# Altium PCB Atmega128.PcbDoc
Units mm, origin at the board's own origin, x right, y up, seen from the top; angles counter-clockwise.
Board outline 45.6 x 43.2 mm, 2 copper layers (Top Layer, Bottom Layer), stack 1.571 mm thick; 29 components, 73 nets, 202 pads, 487 vias.
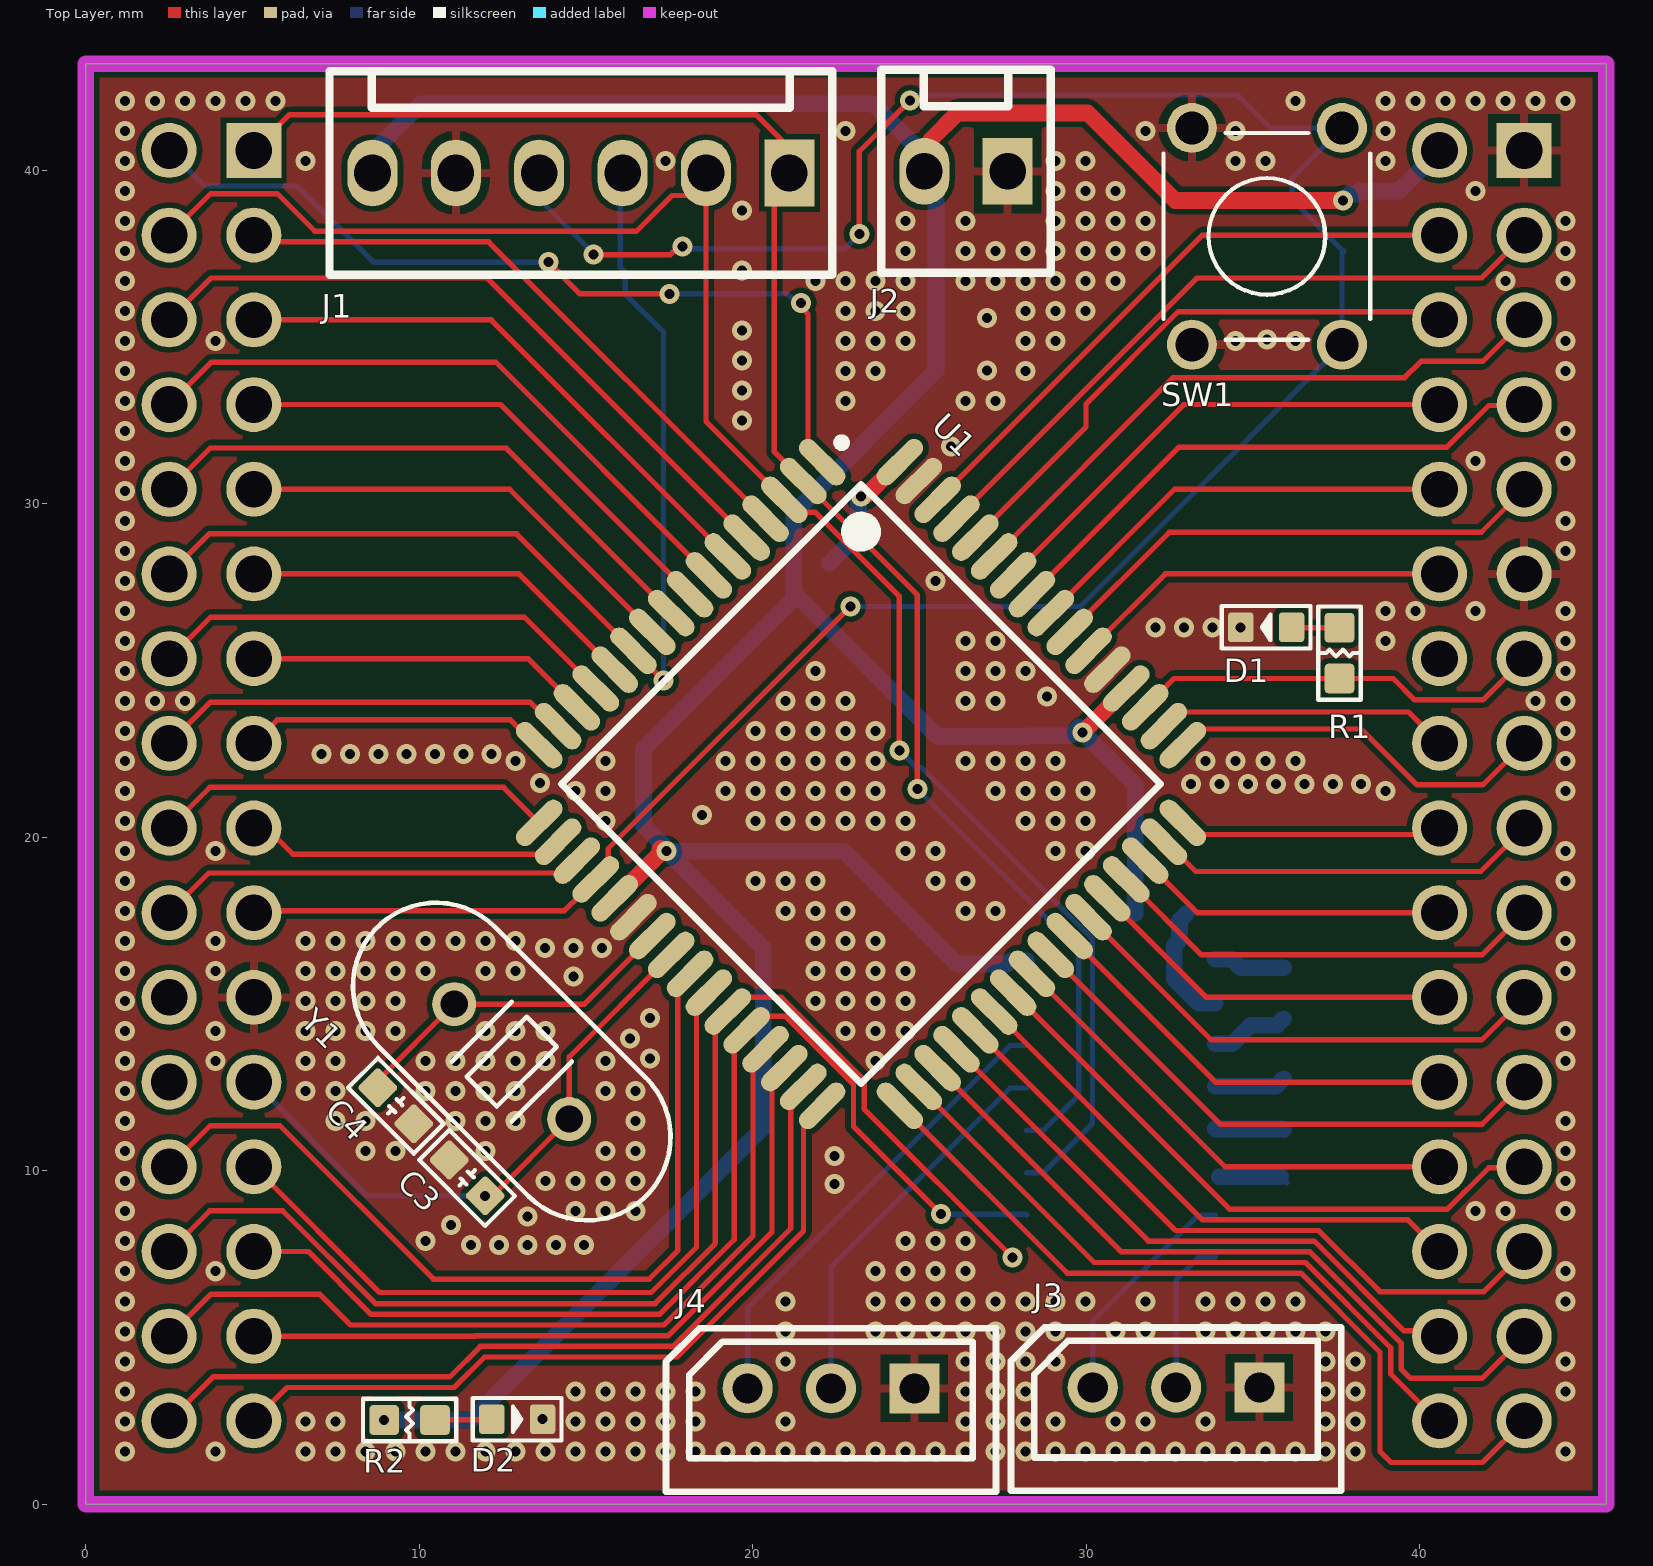
[diagram p0: Top Layer view]
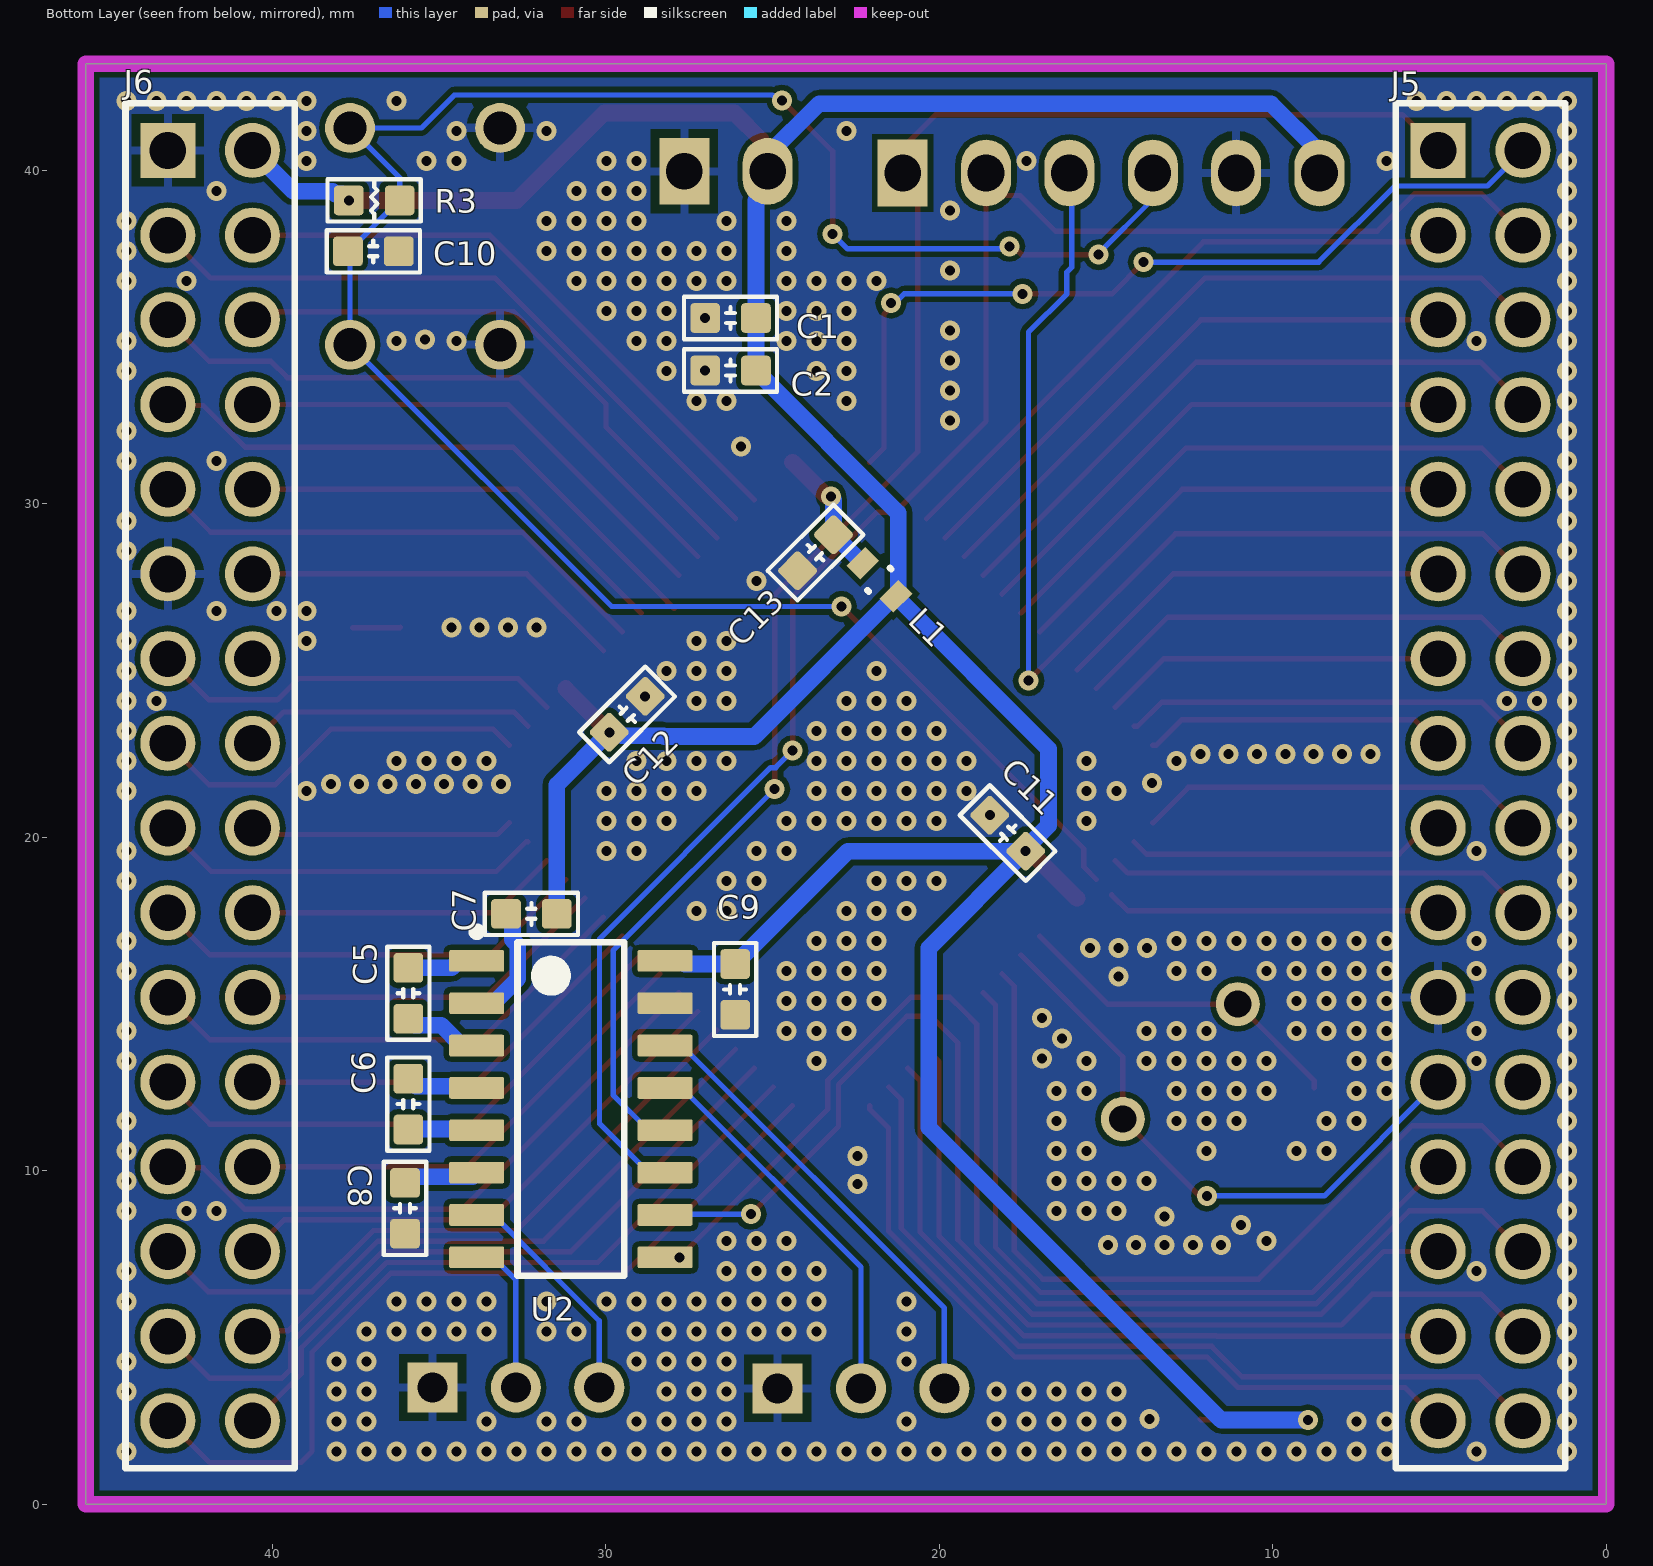
[diagram p1: Bottom Layer view, seen from below]
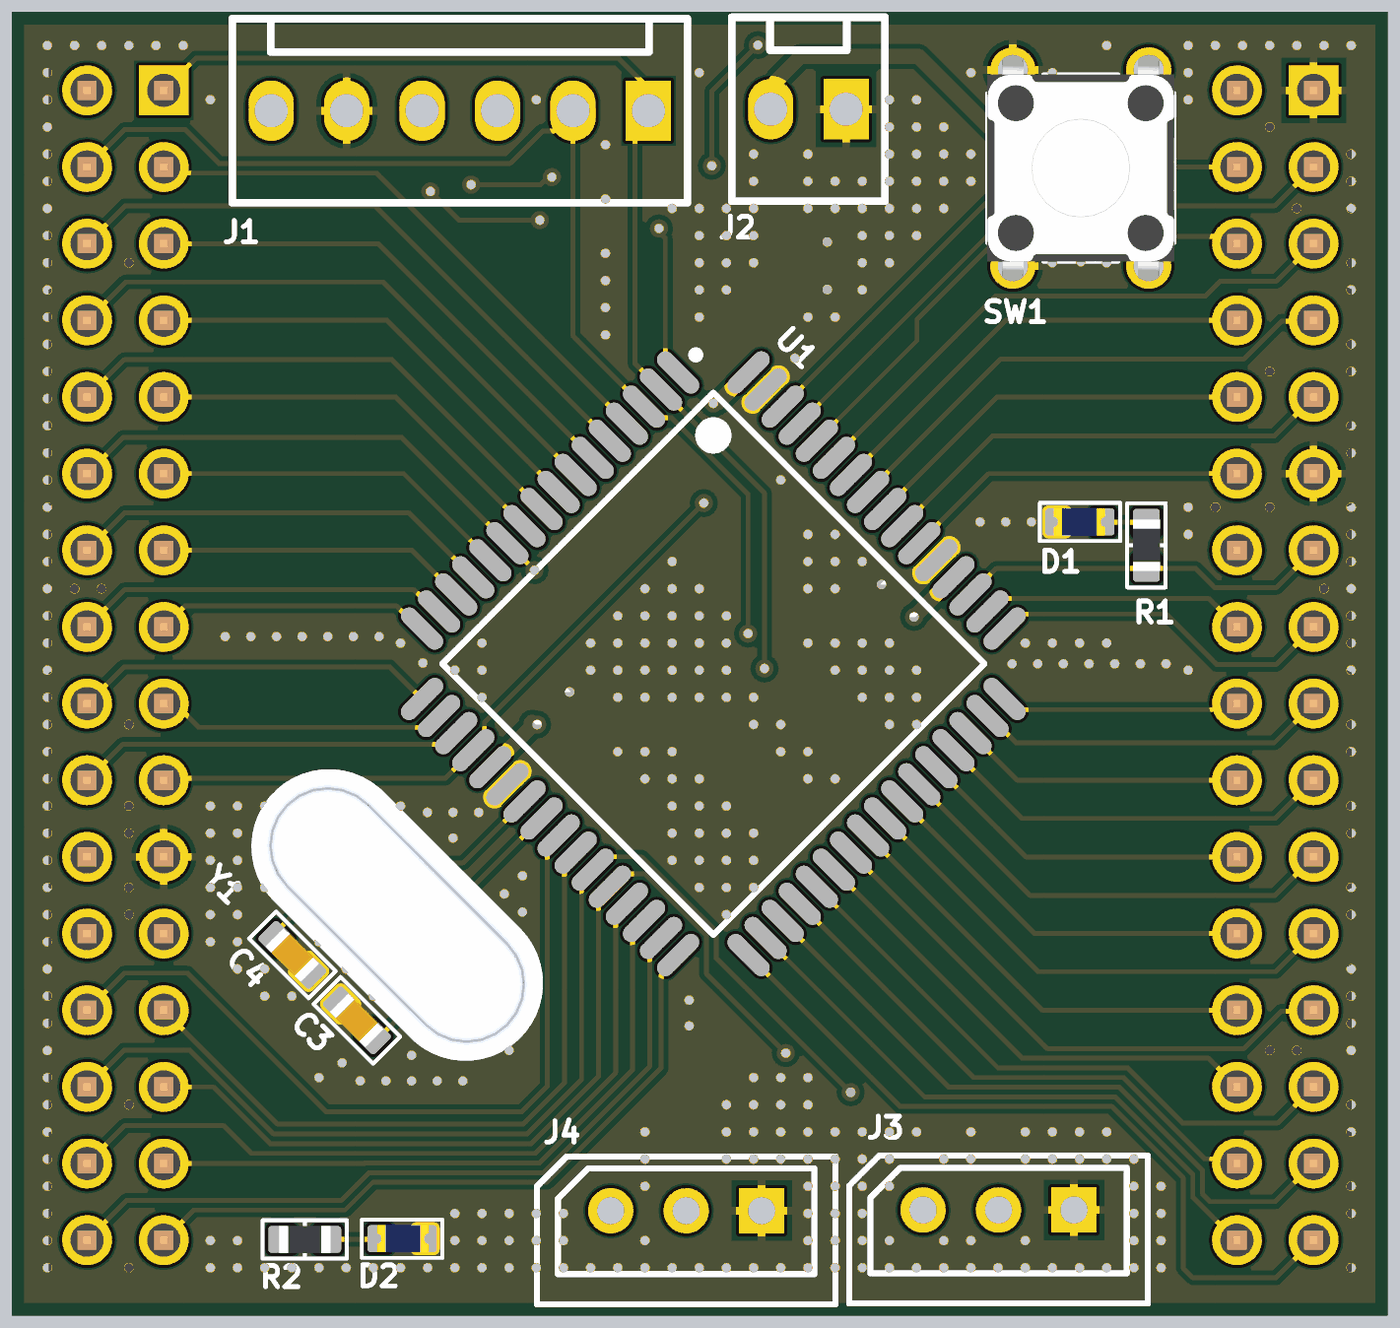
[diagram p2: 3D render of the assembled board from above, using the file's embedded part models]
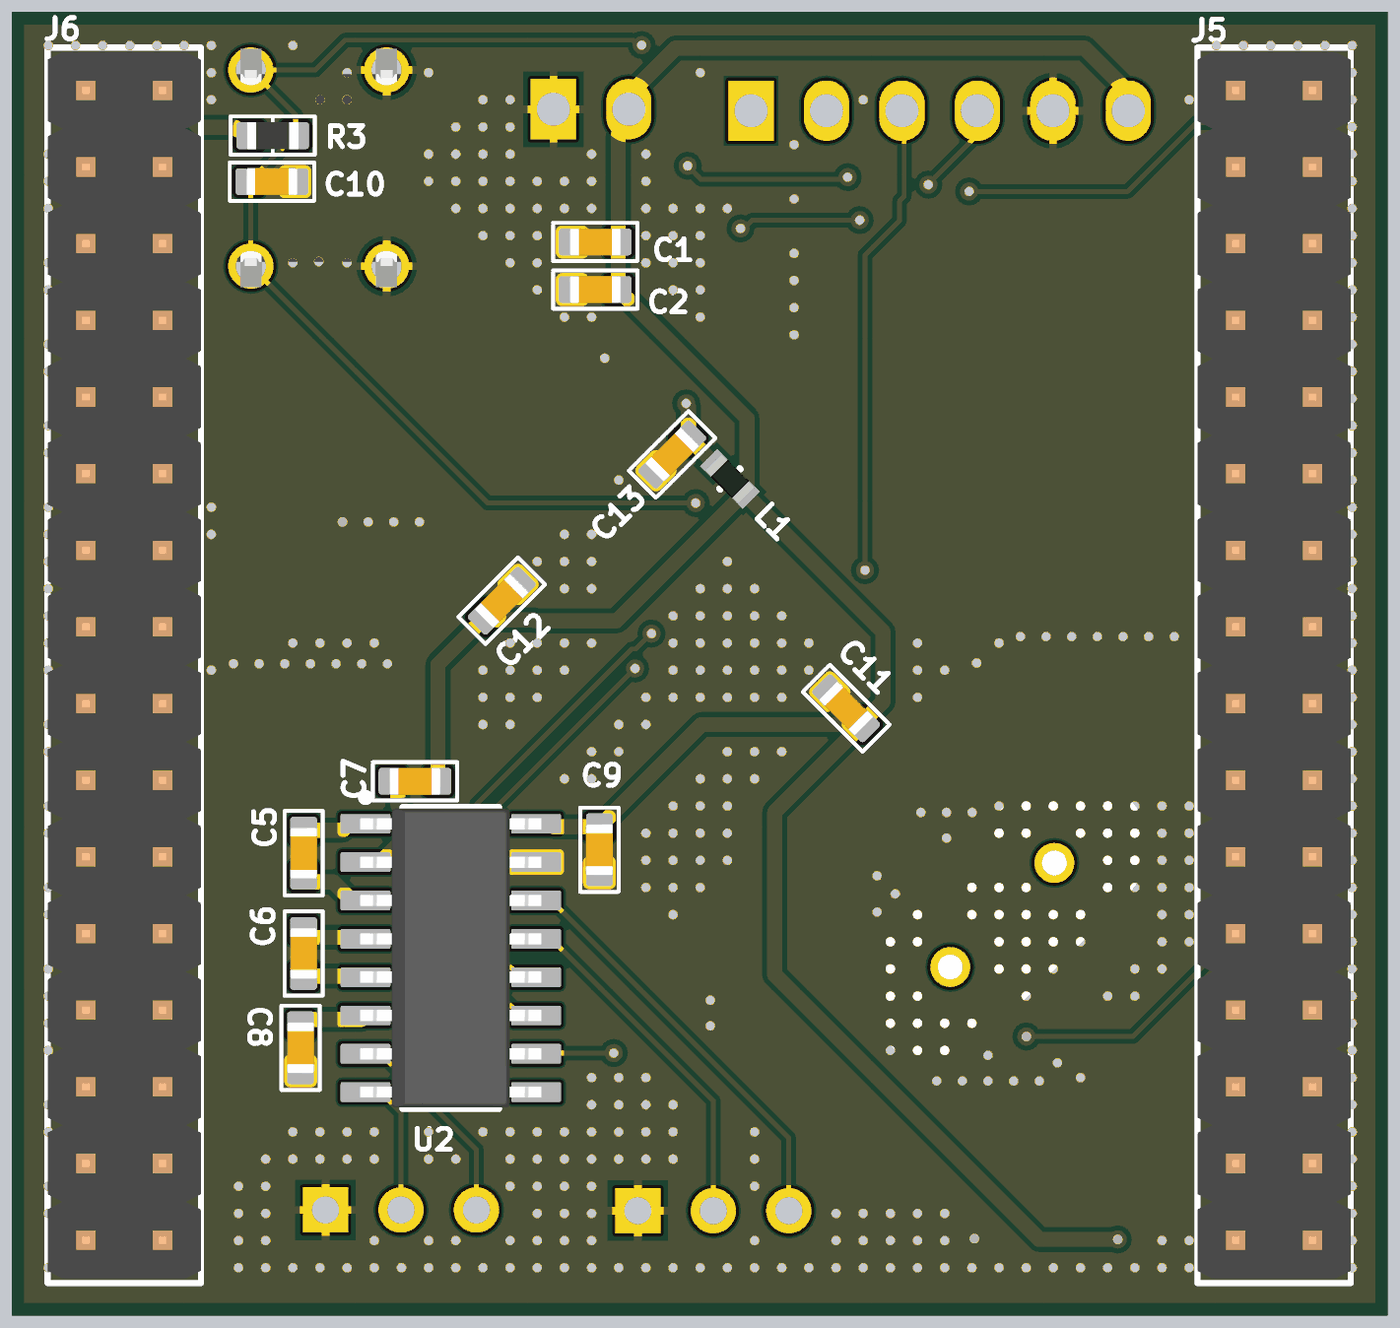
[diagram p3: 3D render of the assembled board from below, using the file's embedded part models]

## Layer stack, top to bottom
Top Solder: solder mask 0.0102, Solder Resist, Dk 3.5
Top Layer: signal copper 0.0356
Dielectric 1: dielectric 1.5, FR-4, Dk 4.8
Bottom Layer: signal copper 0.0356
Bottom Solder: solder mask 0.0102, Solder Resist, Dk 3.5

## Board outline
0,0 45.6,0 45.6,43.2 0,43.2

## Design rules (kind name [scope] priority, off if disabled: settings)
Clearance [All] p1: gap=0.16 ignorepadtopadclearanceinfootprint=FALSE except(0: Arc-Hole Track-Hole SMDPad-Hole THPad-Hole Via-Hole Fill-Hole Poly-Hole Region-Hole Text-Hole)
PolygonConnect [All] p1: thpad.connectstyle=Relief thpad.reliefconductorwidth=0.254 thpad.reliefentries=4 thpad.polygonreliefangle="90 Angle" thpad.airgapwidth=0.254 smdpad.connectstyle=Direct smdpad.reliefconductorwidth=0.254 smdpad.reliefentries=4 smdpad.polygonreliefangle="90 Angle" smdpad.airgapwidth=0.254 via.connectstyle=Direct via.reliefconductorwidth=0.254 via.reliefentries=4 via.polygonreliefangle="90 Angle" via.airgapwidth=0.254
RoomDefinition Sheet1 [InComponentClass('Sheet1')] p1: confinementstyle=ConfineIn formatcopy=TRUE lockcomponents=FALSE outline -10.6,-7.15 78.275,-7.15 78.275,52.025 -10.6,52.025
RoutingVias [All] p1: holewidth=0.3 width=0.6 viastyle="Through Hole" minholewidth=0.3 minwidth=0.6 maxholewidth=0.3 maxwidth=0.6
SolderMaskExpansion SolderMaskExpansion_1 [IsVia] p1: expansion=0.102 istentingtop=TRUE
SolderMaskExpansion [All] p2: expansion=0.102 istentingtop=FALSE
Width [All] p1: maxlimit=1 minlimit=0.16 preferedwidth=0.16 minimp=50.000000 maximp=50.000000 favimp=50.000000
30 further rules are at their usual default settings.

## Components (designator, comment, footprint, x,y, rotation, side; value= is the part's Value field where it differs from the comment)
C1 "Ceramic/1608" "Generic 1608-Footprint-1" 26.263,35.575 r0 bottom value=10uF
C2 "Ceramic/1608" "Generic 1608-Footprint-1" 26.263,34 r0 bottom value=100nF
C3 "Ceramic/1608" "Generic 1608-Footprint-1" 11.439,9.786 r315 top value=20nF
C4 "Ceramic/1608" "Generic 1608-Footprint-1" 9.3,11.95 r135 top value=20nF
C5 "Ceramic/1608" "Generic 1608-Footprint-1" 35.925,15.325 r90 bottom value=1uF
C6 "Ceramic/1608" "Generic 1608-Footprint-1" 35.925,12 r90 bottom value=1uF
C7 "Ceramic/1608" "Generic 1608-Footprint-1" 32.236,17.706 r0 bottom value=1uF
C8 "Ceramic/1608" "Generic 1608-Footprint-1" 36.025,8.875 r90 bottom value=1uF
C9 "Ceramic/1608" "Generic 1608-Footprint-1" 26.125,15.438 r90 bottom value=100nF
C10 "Ceramic/1608" "Generic 1608-Footprint-1" 36.975,37.575 r180 bottom value=100nF
C11 "Ceramic/1608" "Generic 1608-Footprint-1" 17.95,20.125 r45 bottom value=100nF
C12 "Ceramic/1608" "Generic 1608-Footprint-1" 29.361,23.689 r135 bottom value=100nF
C13 "Ceramic/1608" "Generic 1608-Footprint-1" 23.714,28.536 r315 bottom value=100nF
D1 "Generic 1608 LED BLUE" "Generic 1608 LED BLUE-Footprint-1" 35.375,26.3 r180 top
D2 "Generic 1608 LED BLUE" "Generic 1608 LED BLUE-Footprint-1" 12.963,2.55 r0 top
J1 "LW0640-06" LW0640-06 14.85,39.925 r180 top
J2 "LW0640-02" LW0640-02 26.4,39.975 r180 top
J3 "Molex 5267-03" "Molex 5267-03-Footprint" 32.7,3.5 r0 top
J4 "Molex 5267-03" "Molex 5267-03-Footprint" 22.35,3.475 r0 top
J5 "61303221121" 61303221121 3.77,21.55 r270 bottom locked
J6 "61303221121" 61303221121 41.87,21.55 r270 bottom locked
L1 "MLZ1608M100WT000" FP-MLZ1608-MFG 21.8,27.725 r225 bottom value=10uH
R1 "Generic 1608" "Generic 1608-Footprint-1" 37.6,25.525 r270 top value=330
R2 "Generic 1608" "Generic 1608-Footprint-1" 9.712,2.525 r180 top value=330
R3 "Generic 1608" "Generic 1608-Footprint-1" 36.95,39.1 r0 bottom value=4.7k
SW1 "DJT1102A" DJT1102A-Footprint-1 35.425,38.025 r270 top
U1 "ATmega128A-AU" 64A_N 23.25,21.6 r315 top locked
U2 "MAX232D" D0016A_M 31.05,11.85 r180 bottom
Y1 "ATS-49" ATS-49-Footprint-1 12.775,13.275 r45 top value=16MHz

## Footprints (in the part's own frame and the unit in brackets; to place one, negate y for a bottom-side part, rotate by r counter-clockwise, add the part's x,y. Pads: shape width x height; smd on the part's side, far side on the other; paste and mask are expansions set on the pad)
64A_N [mm] "Thin QFP, 64-Leads, Body 14x14mm, Pitch 0.8mm, IPC Medium Density"
  oval 1.75x0.55 smd: 1(-7.65,6) 2(-7.65,5.2) 3(-7.65,4.4) 4(-7.65,3.6) 5(-7.65,2.8) 6(-7.65,2) 7(-7.65,1.2) 8(-7.65,0.4) 9(-7.65,-0.4) 10(-7.65,-1.2) 11(-7.65,-2) 12(-7.65,-2.8) 13(-7.65,-3.6) 14(-7.65,-4.4) 15(-7.65,-5.2) 16(-7.65,-6) 33(7.65,-6) 34(7.65,-5.2) 35(7.65,-4.4) 36(7.65,-3.6) 37(7.65,-2.8) 38(7.65,-2) 39(7.65,-1.2) 40(7.65,-0.4) 41(7.65,0.4) 42(7.65,1.2) 43(7.65,2) 44(7.65,2.8) 45(7.65,3.6) 46(7.65,4.4) 47(7.65,5.2) 48(7.65,6)
  oval 0.55x1.75 smd: 17(-6,-7.65) 18(-5.2,-7.65) 19(-4.4,-7.65) 20(-3.6,-7.65) 21(-2.8,-7.65) 22(-2,-7.65) 23(-1.2,-7.65) 24(-0.4,-7.65) 25(0.4,-7.65) 26(1.2,-7.65) 27(2,-7.65) 28(2.8,-7.65) 29(3.6,-7.65) 30(4.4,-7.65) 31(5.2,-7.65) 32(6,-7.65) 49(6,7.65) 50(5.2,7.65) 51(4.4,7.65) 52(3.6,7.65) 53(2.8,7.65) 54(2,7.65) 55(1.2,7.65) 56(0.4,7.65) 57(-0.4,7.65) 58(-1.2,7.65) 59(-2,7.65) 60(-2.8,7.65) 61(-3.6,7.65) 62(-4.4,7.65) 63(-5.2,7.65) 64(-6,7.65)
  silkscreen extent -7.77,-6.35 6.35,6.95, body extent -7,-7 7,7, height 1.6
61303221121 [mm] "Pin Header, pitch 2.54 mm, THT, Vertical, dual row, 32p"
  rect 1.65x1.65 hole 1.1: 1(-19.05,-1.27)
  round 1.65 hole 1.1: 2(-19.05,1.27) 3(-16.51,-1.27) 4(-16.51,1.27) 5(-13.97,-1.27) 6(-13.97,1.27) 7(-11.43,-1.27) 8(-11.43,1.27) 9(-8.89,-1.27) 10(-8.89,1.27) 11(-6.35,-1.27) 12(-6.35,1.27) 13(-3.81,-1.27) 14(-3.81,1.27) 15(-1.27,-1.27) 16(-1.27,1.27) 17(1.27,-1.27) 18(1.27,1.27) 19(3.81,-1.27) 20(3.81,1.27) 21(6.35,-1.27) 22(6.35,1.27) 23(8.89,-1.27) 24(8.89,1.27) 25(11.43,-1.27) 26(11.43,1.27) 27(13.97,-1.27) 28(13.97,1.27) 29(16.51,-1.27) 30(16.51,1.27) 31(19.05,-1.27) 32(19.05,1.27)
  silkscreen extent -20.47,-2.54 20.47,2.54, body extent -20.32,-2.54 20.32,2.54, height 8.59
ATS-49-Footprint-1 [mil]
  round 52 hole 32: 1(0,96) 2(0,-96)
  silkscreen extent -98,-224 98,224, body extent -98,-226 98,226, height 138
D0016A_M [mm] "SOIC, 16-Leads, Body 10x4mm, Pitch 1.27mm, IPC Low Density"
  rrect15% 1.65x0.65 smd: 1(-2.825,4.445) 2(-2.825,3.175) 3(-2.825,1.905) 4(-2.825,0.635) 5(-2.825,-0.635) 6(-2.825,-1.905) 7(-2.825,-3.175) 8(-2.825,-4.445) 9(2.825,-4.445) 10(2.825,-3.175) 11(2.825,-1.905) 12(2.825,-0.635) 13(2.825,0.635) 14(2.825,1.905) 15(2.825,3.175) 16(2.825,4.445)
  silkscreen extent -2.95,-5 1.6,5.44, body extent -3,-4.95 3,4.95, height 1.59
DJT1102A-Footprint-1 [mm]
  round 1.5 hole 1: 1(-3.25,2.25) 2(-3.25,-2.25) 3(3.25,2.25) 4(3.25,-2.25)
  silkscreen extent -3.1,-3.1 3.1,3.1, body extent -3.95,-3.1 3.95,3.1, height 4.3
FP-MLZ1608-MFG [mm]
  rect 0.6x0.8 smd paste+0 mask+0: 1(-0.7,0) 2(0.7,0)
  silkscreen extent -0.02,-0.48 0.03,0.48, body extent -0.8,-0.4 0.8,0.4, height 0.95
"Generic 1608 LED BLUE-Footprint-1" [mil]
  rrect25% 30x35 smd: 1(-30.98,0) 2(29.02,0)
  silkscreen extent -53,-25 52,25, body extent -33,-18 33,18, height 35
"Generic 1608-Footprint-1" [mil]
  rrect25% 35x35 smd: 1(-30,0) 2(30,0)
  silkscreen extent -55,-25 55,25, body extent -33,-18 33,18, height 35
LW0640-02 [mm]
  rect 1.5x2 hole 1.1: 1(-1.25,0)
  oval 1.5x2 hole 1.1: 2(1.25,0)
  silkscreen extent -2.54,-3.05 2.54,3.05, body extent -2.5,-2.95 2.5,3.05, height 11.81
LW0640-06 [mm]
  rect 1.5x2 hole 1.1: 1(-6.25,0)
  oval 1.5x2 hole 1.1: 2(-3.75,0) 3(-1.25,0) 4(1.25,0) 5(3.75,0) 6(6.25,0)
  silkscreen extent -7.54,-3.05 7.54,3.05, body extent -7.5,-2.95 7.5,3.05, height 11.81
"Molex 5267-03-Footprint" [mm]
  rect 1.5x1.5 / inner round 1.5 / far side rect 1.5x1.5 hole 0.9: 1(2.5,0)
  round 1.5 hole 0.9: 2(0,0) 3(-2.5,0)
  silkscreen extent -4.95,-3.1 4.95,1.8, body extent -4.95,-3.1 4.95,1.8, height 5.81

## Part data
C1 C2 C3 C4 C5 C6 C7 C8 C9 C10 C11 C12 C13: library part CMP-002-0009-2, "Generic 1608 Ceramic Capacitor", Capacitor Type=Ceramic, Case/Package=1608, Mount=SMD, Pins=2, RoHS=Yes
D1 D2: library part CMP-008-0003-2, "Generic 1608 LED <BLUE>"
J1: library part CMP-003-0008-4, "6-pin Molex 5045 compatible Hanlim Connector", Pin Count=6
J2: library part CMP-003-0004-4, "2-pin Molex 5045 compatible Hanlim Connector", Pin Count=2
J3 J4: library part CMP-003-0028-2, "2.50mm (.098\") Pitch SPOX Wire-to-Board Header, Vertical, Shrouded, 3 Circuits, Tin (Sn) Plating", Contact Resistance=20mR, Current Rating=3A, Flammability Rating="UL94 V-0", Insulation Resistance=1GR, Max Operating Temperature=105°C, Min Operating Temperature=-40°C, Package Quantity=25000, Test Voltage=1kV, Voltage Rating=250V, Contact Gender=Male, Contact Material=Brass,Tin, Contact Plating=Tin,Copper, Gender=Male, Glow Wire Compliant=Non-compliant, Housing Material=Nylon, Lead Free="Lead Free", Mount="Through Hole,PCB", Number of Circuits=3, Number of Contacts=3, Number of Poles=3, Number of Positions=3, Number of Rows=1, Orientation=Straight, Packaging=Bulk, Pitch=2.5mm, Radiation Hardening=No, REACH SVHC=Unknown, Shrouded="Yes (With)", Termination=Solder, Voltage Rating (AC)=250V, Voltage Rating (DC)=250V, Working Voltage=250V
J5 J6: library part CMP-005-0116-1, "Pin Header WR-PHD, pitch 2.54 mm, THT, Vertical, dual row, 32 pin", Contact Resistance="20 mOhm", Insulation Resistance=">1000 MOhm", Operating Temperature="-40 to 105 degC", Rated Current="3 A", Working Voltage="250 VAC", Component Name=61303221121, ComponentLink1Description=Manufacturer, ComponentLink1URL=http://www.we-online.de, ComponentLink2Description=Datasheet, ComponentLink2URL=http://katalog.we-online.de/em/datasheet/6130xx21121.pdf, Mounting Technology=THT, Orientation=Vertical, Part Number=61303221121, Pin Count=32, Pin Number=32, Pitch="2.54 mm", Published Date="Jan. 2018", Publisher="Wurth Elektronik", Row Number=Dual
L1: library part CMP-08253-000012-1, "FIXED IND 10UH 250MA 1.05 OHM", Inductance=10uH, Manufacturer=TDK, Package=MLZ1608, Rms Current=250mA, Saturation Current=90mA, Series Resistance=1.05Ω, Temperature="-55°C to +125°C", Temperature Range High=+125°C, Temperature Range Low=-55°C, Test Frequency=2MHz, Tolerance=20%, Automotive=No, Category=Ind, ComponentLink2Description=Datasheet, ComponentLink2URL=https://product.tdk.com/info/en/catalog/datasheets/inductor_commercial_decoupling_mlz1608_en.pdf, Composition=Multilayer, Core Material=Ferrite, Device Class L1="Passive Components", Device Class L2=Inductors, Device Class L3="Fixed Inductors", Digikey Description="FIXED IND 10UH 250MA 1.05 OHM", Height=0.95mm, Ipc Land Pattern Name=CAPC16080X80, Lead Free=Yes, Manufacturer Part Number=MLZ1608M100WT000, Octopart=https://octopart.com/mlz1608m100wt000-tdk-22244539, RoHS=TRUE, Shielding=true
R1 R2 R3: library part CMP-001-0018-1, "Generic 1608 Resistor", Case/Package=Bulk, Mount=SMD, Pins=2, RoHS=Yes
SW1: library part CMP-ROOT-00011-1, "6.0mm 6.0mm tact switch", Case/Package=6x6mm, Mount=Thruhole, Pins=4, RoHS=Yes
U1: library part CMP-0095-00232-2, "8-bit AVR Microcontroller, 2.7-5.5V, 16MHz, 128KB Flash, 4KB EEPROM, 4KB SRAM, 64-pin TQFP, Industrial Grade (-40°C to 85°C)", Code_JEDEC=MS-026-AEB, ComponentLink1Description="Manufacturer URL", ComponentLink1URL=http://www.atmel.com/, ComponentLink2Description="ATmega128A Datasheet", ComponentLink2URL=http://www.atmel.com/dyn/resources/prod_documents/doc8151.pdf, ComponentLink3Description="ATmega128A Summary", ComponentLink3URL=http://www.atmel.com/dyn/resources/prod_documents/8151S.pdf, DatasheetVersion="revH, Feb-2011", PackageDescription="64-Pin Plastic Thin Profile Quad Flat Pack, 14 x 14 x 1.0 mm Body, 0.8 mm Pitch (TQFP)", PackageReference=64A, PackageVersion="revC, Oct-2010", RevisionNote="DatasheetVersion & PackageVersion updated. URLs added."
U2: library part CMP-0299-00137-2, "Dual EIA-232 Driver / Receiver, 0 to 70 degC, 16-Pin SOIC (D), Green (RoHS & no Sb/Br)", Drivers Per Package=2, Supply Voltage(s)(V)=5, ComponentLink1Description="Manufacturer URL", ComponentLink1URL=www.ti.com, ComponentLink2Description=Datasheet, ComponentLink2URL=http://www.ti.com/general/docs/lit/getliterature.tsp?genericPartNumber=MAX232&fileType=pdf, ComponentLink3Description="Package Specification", ComponentLink3URL=http://www.ti.com/litv/pdf/mpds178g, DatasheetVersion=SLLS047L, ESD HBM(kV)=+/-2, ICC(Max)(mA)=10, PackageDescription="16-Pin Plastic Small Outline Integrated Circuit, 9.9 x 3.9 mm, Pitch 1.27 mm Pitch", PackageReference=D0016A, PackageVersion="revM, Jun-2011", Receivers Per Package=2, RS-232=TRUE, Single Supply=TRUE, SubFamily=RS-232
Y1: library part CMP-015-0000-2, "Crystal ATS-49U", ESR (Equivalent Series Resistance)=200R, Frequency Stability=50ppm, Frequency Tolerance=30ppm, Load Capacitance=18pF, Max Operating Temperature=70°C, Min Operating Temperature=-20°C, Case/Package=ATS-49, Depth=4.65mm, Length=11.05mm, Mount="Through Hole", Number of Pins=2, RoHS=Yes, Series Resistance=200R

## Via types
v1: diameter 0.6, hole 0.3, Top Layer to Bottom Layer, tented both sides, 487 vias

## Nets (pads, with @x,y where several pads share a name; then routed paths per layer and width w, separated by ;. In a path a pad name is that pad's centre, name@x,y a point inside that pad or via, vN(x,y) a via of type N, cw(c..) or ccw(c..) an arc to the next point about the centre after c; other vN are vias at no path point)
+5: C1.1 C2.1 C7.1 C9.2 C11.1 C12.1 J1.6 J2.2 J6.2 L1.2 R2.2 R3.2 U1.21 U1.52 U2.16 | length 118.8
  Top Layer w0.5: U1.21 15.874,18.171 17.217,19.513 17.217,19.645 v1@17.236,19.664 ; J2.2 25.341,40.166 25.341,40.921 26.146,41.725 30.05,41.725 32.675,39.1 v1(37.712,39.1) ; v1(29.9,23.15) 31.205,24.455 U1.52
  Bottom Layer w0.5: J1.6 8.6,40.55 10.05,42 23.607,42 25.15,40.457 J2.2 25.15,39.454 25.501,39.103 C1.1 C2.1 21.234,29.733 21.234,27.301 L1.2 ; v1(8.95,2.525) 11.55,2.525 20.316,11.291 20.316,16.682 v1(17.411,19.586) C11.1@17.489,19.586 ; U2.16 27.725,16.295 27.63,16.2 C9.2 22.739,19.586 C11.1@17.489,19.586 ; C12.1@29.784,23.309 29.525,23.05 28.275,23.05 28.25,23.025 25.55,23.025 21.345,27.23 L1.2 ; C12.1@29.956,23.094 31.474,21.576 C7.1 ; v1(37.712,39.1) 37.907,39.295 38.119,39.295 38.199,39.375 39.375,39.375 J6.2 ; C11.1@17.489,19.586 16.725,20.35 16.725,22.65 L1.2
AREF: J6.4 U1.62 | length 18.3
  Top Layer w0.16: U1.62 33.487,38.06 J6.4
GND: C1.2 C2.2 C3.1 C4.1 C8.1 C9.1 C10.2 C11.2 C12.2 C13.2 D1.2 D2.2 J1.5 J2.1 J3.1 J4.1 J5.21 J6.1 J6.11 SW1.2 SW1.4 U1.22 U1.53 U1.63 U2.15
  other v1: 1.184,1.587 3.884,1.587 6.584,1.587 7.484,1.587 8.384,1.587 9.284,1.587 10.184,1.587 11.084,1.587 11.984,1.587 12.884,1.587 13.784,1.587 14.684,1.587 15.584,1.587 16.484,1.587 17.384,1.587 18.284,1.587 19.184,1.587 20.084,1.587 20.984,1.587 21.884,1.587 22.784,1.587 23.684,1.587 24.584,1.587 25.484,1.587 26.384,1.587 27.284,1.587 28.184,1.587 29.084,1.587 29.984,1.587 30.884,1.587 31.784,1.587 32.684,1.587 33.584,1.587 34.484,1.587 35.384,1.587 36.284,1.587 37.184,1.587 38.084,1.587 44.384,1.587 1.184,2.487 6.584,2.487 7.484,2.487 14.684,2.487 15.584,2.487 16.484,2.487 17.384,2.487 18.284,2.487 20.984,2.487 26.384,2.487 27.284,2.487 28.184,2.487 29.084,2.487 30.884,2.487 31.784,2.487 33.584,2.487 37.184,2.487 38.084,2.487 13.7,2.55 1.184,3.387 14.684,3.387 15.584,3.387 16.484,3.387 17.384,3.387 18.284,3.387 26.384,3.387 27.284,3.387 28.184,3.387 37.184,3.387 38.084,3.387 44.384,3.387 1.184,4.287 20.984,4.287 26.384,4.287 27.284,4.287 28.184,4.287 29.084,4.287 37.184,4.287 38.084,4.287 44.384,4.287 1.184,5.187 20.984,5.187 23.684,5.187 24.584,5.187 25.484,5.187 26.384,5.187 27.284,5.187 28.184,5.187 29.084,5.187 30.884,5.187 31.784,5.187 33.584,5.187 34.484,5.187 35.384,5.187 36.284,5.187 37.184,5.187 1.184,6.087 20.984,6.087 23.684,6.087 24.584,6.087 25.484,6.087 26.384,6.087 27.284,6.087 28.184,6.087 29.084,6.087 29.984,6.087 31.784,6.087 33.584,6.087 34.484,6.087 35.384,6.087 36.284,6.087 44.384,6.087 1.184,6.987 3.884,6.987 23.684,6.987 24.584,6.987 25.484,6.987 26.384,6.987 44.384,6.987 11.55,7.775 12.4,7.775 13.25,7.775 14.1,7.775 14.95,7.775 1.184,7.887 10.184,7.887 24.584,7.887 25.484,7.887 26.384,7.887 10.949,8.376 13.25,8.625 1.184,8.787 14.684,8.787 15.584,8.787 16.484,8.787 41.684,8.787 42.584,8.787 44.384,8.787 22.45,9.6 1.184,9.687 13.784,9.687 14.684,9.687 15.584,9.687 16.484,9.687 44.384,9.687 22.45,10.45 1.184,10.587 8.384,10.587 9.284,10.587 11.984,10.587 15.584,10.587 16.484,10.587 44.384,10.587 1.184,11.487 7.484,11.487 8.384,11.487 11.084,11.487 11.984,11.487 12.884,11.487 16.484,11.487 44.384,11.487 1.184,12.387 6.584,12.387 7.484,12.387 10.184,12.387 11.084,12.387 11.984,12.387 12.884,12.387 15.584,12.387 16.484,12.387 1.184,13.287 3.884,13.287 6.584,13.287 7.484,13.287 10.184,13.287 11.084,13.287 11.984,13.287 12.884,13.287 13.784,13.287 15.584,13.287 23.684,13.287 44.384,13.287 16.925,13.373 16.324,13.974 1.184,14.187 3.884,14.187 6.584,14.187 7.484,14.187 8.384,14.187 9.284,14.187 11.984,14.187 12.884,14.187 13.784,14.187 22.784,14.187 23.684,14.187 24.584,14.187 44.384,14.187 16.925,14.575 1.184,15.087 6.584,15.087 7.484,15.087 8.384,15.087 9.284,15.087 21.884,15.087 22.784,15.087 23.684,15.087 24.584,15.087 14.625,15.825 1.184,15.987 3.884,15.987 6.584,15.987 7.484,15.987 8.384,15.987 9.284,15.987 10.184,15.987 11.984,15.987 12.884,15.987 21.884,15.987 22.784,15.987 23.684,15.987 24.584,15.987 44.384,15.987 13.775,16.675 14.625,16.675 15.475,16.675 1.184,16.887 3.884,16.887 6.584,16.887 7.484,16.887 8.384,16.887 9.284,16.887 10.184,16.887 11.084,16.887 11.984,16.887 12.884,16.887 21.884,16.887 22.784,16.887 23.684,16.887 44.384,16.887 1.184,17.787 20.984,17.787 21.884,17.787 22.784,17.787 26.384,17.787 27.284,17.787 1.184,18.687 20.084,18.687 20.984,18.687 21.884,18.687 25.484,18.687 26.384,18.687 44.384,18.687 1.184,19.587 3.884,19.587 24.584,19.587 25.484,19.587 29.084,19.587 29.984,19.587 44.384,19.587 1.184,20.487 15.584,20.487 20.084,20.487 20.984,20.487 21.884,20.487 22.784,20.487 23.684,20.487 24.584,20.487 28.184,20.487 29.084,20.487 29.984,20.487 18.489,20.664 1.184,21.387 14.684,21.387 15.584,21.387 19.184,21.387 20.084,21.387 20.984,21.387 21.884,21.387 22.784,21.387 23.684,21.387 27.284,21.387 28.184,21.387 29.084,21.387 29.984,21.387 38.984,21.387 44.384,21.387 33.149,21.6 33.999,21.6 34.849,21.6 35.699,21.6 36.55,21.6 37.4,21.6 38.25,21.6 13.625,21.625 1.184,22.287 12.884,22.287 15.584,22.287 19.184,22.287 20.084,22.287 20.984,22.287 21.884,22.287 22.784,22.287 23.684,22.287 26.384,22.287 27.284,22.287 28.184,22.287 29.084,22.287 33.584,22.287 34.484,22.287 35.384,22.287 36.284,22.287 44.384,22.287 7.075,22.5 7.075,22.5 7.925,22.5 8.775,22.5 9.625,22.5 10.475,22.5 11.325,22.5 12.175,22.5 1.184,23.187 20.084,23.187 20.984,23.187 21.884,23.187 22.784,23.187 23.684,23.187 44.384,23.187 1.184,24.087 2.084,24.087 2.984,24.087 20.984,24.087 21.884,24.087 22.784,24.087 26.384,24.087 27.284,24.087 43.484,24.087 44.384,24.087 28.822,24.228 1.184,24.987 21.884,24.987 26.384,24.987 27.284,24.987 28.184,24.987 44.384,24.987 1.184,25.887 26.384,25.887 27.284,25.887 38.984,25.887 44.384,25.887 32.088,26.3 32.938,26.3 33.788,26.3 34.638,26.3 1.184,26.787 38.984,26.787 39.884,26.787 41.684,26.787 44.384,26.787 1.184,27.687 25.484,27.687 1.184,28.587 44.384,28.587 1.184,29.487 44.384,29.487 1.184,30.387 1.184,31.287 41.684,31.287 44.384,31.287 25.95,31.725 1.184,32.187 44.384,32.187 19.675,32.5 1.184,33.087 22.784,33.087 26.384,33.087 27.284,33.087 19.675,33.4 1.184,33.987 22.784,33.987 23.684,33.987 27.025,34 28.184,33.987 44.384,33.987 19.675,34.3 1.184,34.887 3.884,34.887 22.784,34.887 23.684,34.887 24.584,34.887 28.184,34.887 29.084,34.887 34.484,34.887 36.284,34.887 44.384,34.887 35.425,34.925 19.675,35.2 27.025,35.575 1.184,35.787 22.784,35.787 23.684,35.787 24.584,35.787 28.184,35.787 29.084,35.787 29.984,35.787 1.184,36.687 21.884,36.687 22.784,36.687 23.684,36.687 24.584,36.687 26.384,36.687 27.284,36.687 28.184,36.687 29.084,36.687 29.984,36.687 30.884,36.687 42.584,36.687 44.384,36.687 19.675,37 1.184,37.587 24.584,37.587 26.384,37.587 27.284,37.587 28.184,37.587 29.084,37.587 29.984,37.587 30.884,37.587 31.784,37.587 44.384,37.587 1.184,38.487 24.584,38.487 26.384,38.487 29.084,38.487 29.984,38.487 30.884,38.487 31.784,38.487 44.384,38.487 19.675,38.8 1.184,39.387 29.084,39.387 29.984,39.387 30.884,39.387 41.684,39.387 1.184,40.287 6.584,40.287 17.384,40.287 29.084,40.287 29.984,40.287 34.484,40.287 35.384,40.287 38.984,40.287 1.184,41.187 22.784,41.187 31.784,41.187 34.484,41.187 38.984,41.187 1.184,42.087 2.084,42.087 2.984,42.087 3.884,42.087 4.784,42.087 5.684,42.087 36.284,42.087 38.984,42.087 39.884,42.087 40.784,42.087 41.684,42.087 42.584,42.087 43.484,42.087 44.384,42.087
NetC5_1: C5.1 U2.3 | length 2.4
  Bottom Layer w0.5: U2.3@33.875,13.805 34.375,13.805 34.938,14.369 35.73,14.369 C5.1
NetC5_2: C5.2 U2.1 | length 2.2
  Bottom Layer w0.5: U2.1@33.875,16.345 34.375,16.345 34.633,16.087 C5.2
NetC6_1: C6.1 U2.5 | length 2.1
  Bottom Layer w0.5: U2.5@33.875,11.265 33.888,11.252 35.911,11.252 C6.1
NetC6_2: C6.2 U2.4 | length 2.1
  Bottom Layer w0.5: U2.4@33.875,12.535 35.698,12.535 C6.2
NetC7_2: C7.2 U2.2 | length 3.6
  Bottom Layer w0.5: C7.2 32.803,17.511 32.803,16.924 32.64,16.761 32.64,15.76 33.375,15.025 U2.2
NetC8_2: C8.2 U2.6 | length 2.3
  Bottom Layer w0.16: U2.6 U2.6@34,9.82 ; C8.2@35.842,9.82 C8.2
  Bottom Layer w0.5: U2.6@34,9.82 C8.2@35.842,9.82
NetC13_1: C13.1 L1.1 U1.64 | length 4
  Top Layer w0.5: v1(23.25,30.227) 23.269,30.246 23.397,30.246 24.403,31.252 U1.64
  Bottom Layer w0.5: L1.1 22.307,28.22 23.163,29.075 C13.1 23.175,30.125 23.25,30.2 v1(23.25,30.227)
NetD1_1: D1.1 R1.1 | length 1.4
  Top Layer w0.16: D1.1 36.175,26.287 R1.1
NetD2_1: D2.1 R2.1 | length 1.7
  Top Layer w0.16: R2.1 10.479,2.53 12.156,2.53 D2.1
PA0: J6.13 R1.2 U1.51 | length 12.5
  Top Layer w0.16: U1.51 32.636,24.763 R1.2 39.212,24.763 39.85,24.125 41.905,24.125 J6.13
PA1: J6.16 U1.50 | length 8.8
  Top Layer w0.16: U1.50 32.761,23.757 39.663,23.757 J6.16
PA2: J6.15 U1.49 | length 11.6
  Top Layer w0.16: U1.49 33.385,23.25 38.25,23.25 39.925,21.575 41.895,21.575 J6.15
PA3: J6.18 U1.48 | length 7.9
  Top Layer w0.16: U1.48 33.252,20.084 40.404,20.084 J6.18
PA4: J6.17 U1.47 | length 11.7
  Top Layer w0.16: U1.47 32.397,19.868 33.289,18.975 41.835,18.975 J6.17
PA5: J6.20 U1.46 | length 9.5
  Top Layer w0.16: U1.46 33.333,17.74 J6.20
PA6: J6.19 U1.45 | length 13.4
  Top Layer w0.16: U1.45 33.466,16.475 41.875,16.475 J6.19
PA7: J6.22 U1.44 | length 11.2
  Top Layer w0.16: U1.44 33.61,15.2 J6.22
PB0: J5.9 U1.10 | length 13.7
  Top Layer w0.16: J5.9 12.713,30.44 U1.10
PB1: J1.3 J5.12 U1.11 | length 32.9
  Top Layer w0.16: J5.12 3.7,29.1 12.922,29.1 U1.11 16.428,25.595 17.323,24.7 v1(17.325,24.7)
  Bottom Layer w0.16: J1.3 16.025,39.85 16.025,37.1 16.175,36.95 16.175,36.3 17.325,35.15 v1(17.325,24.7)
PB2: J5.11 U1.12 | length 12
  Top Layer w0.16: J5.11 12.99,27.9 U1.12
PB3: J5.14 U1.13 | length 14.2
  Top Layer w0.16: J5.14 3.74,26.6 13.159,26.6 U1.13
PB4: J5.13 U1.14 | length 10.3
  Top Layer w0.16: J5.13 13.267,25.36 U1.14
PB5: J5.16 U1.15 | length 12.5
  Top Layer w0.16: J5.16 3.73,24.05 13.341,24.05 14.058,23.332 U1.15
PB6: J5.15 U1.16 | length 9.2
  Top Layer w0.16: J5.15 5.743,23.523 12.737,23.523 13.492,22.767 U1.16
PB7: J5.18 U1.17 | length 12
  Top Layer w0.16: J5.18 3.72,21.5 12.531,21.5 U1.17
PC0: J6.29 U1.35 | length 22.4
  Top Layer w0.16: U1.35 31.057,7.57 36.71,7.57 39.457,4.823 39.457,4.043 39.725,3.775 41.875,3.775 J6.29
PC1: J6.30 U1.36 | length 18.1
  Top Layer w0.16: U1.36 31.869,7.89 36.843,7.89 39.535,5.198 40.442,5.198 J6.30
PC2: J6.27 U1.37 | length 20.2
  Top Layer w0.16: U1.37 32.68,8.21 36.975,8.21 38.81,6.375 41.935,6.375 J6.27
PC3: J6.28 U1.38 | length 16.3
  Top Layer w0.16: U1.38 33.492,8.53 39.65,8.53 J6.28
PC4: J6.25 U1.39 | length 18.5
  Top Layer w0.16: U1.39 34.303,8.85 40.836,8.85 42.075,10.089 43.109,10.089 J6.25
PC5: J6.26 U1.40 | length 14.6
  Top Layer w0.16: U1.40 34.164,10.12 J6.26
PC6: J6.23 U1.41 | length 16.8
  Top Layer w0.16: U1.41 31.657,13.758 31.662,13.758 34.02,11.4 41.88,11.4 J6.23
PC7: J6.24 U1.42 | length 12.9
  Top Layer w0.16: U1.42 33.887,12.66 J6.24
PD0: J5.26 U1.25 | length 26.5
  Top Layer w0.16: J5.26 3.73,11.35 5.825,11.35 10.425,6.75 16.9,6.75 17.75,7.6 17.75,14.704 17.75,15.534 U1.25
PD1: J5.25 U1.26 | length 23.2
  Top Layer w0.16: J5.25 8.81,6.35 16.959,6.35 18.316,7.706 18.316,14.969 U1.26
PD2: J5.28 U1.27 U2.9 | length 38.4
  Top Layer w0.16: J5.28 3.72,8.8 5.907,8.8 8.692,6.015 17.077,6.015 18.881,7.819 18.881,14.403 U1.27 19.679,15.201 20.86,15.201 23.343,12.718 23.343,11.857 v1(27.8,7.4)
PD3: J5.27 U1.28 U2.10 | length 34.3
  Top Layer w0.16: J5.27 6.675,7.58 8.56,5.695 17.21,5.695 19.447,7.932 19.447,13.837 20.245,14.635 20.973,14.635 23.023,12.586 23.023,11.327 v1(25.65,8.7)
  Bottom Layer w0.16: v1(25.65,8.7) 28.2,8.7 U2.10
PD4: J5.30 U1.29 | length 25.3
  Top Layer w0.16: J5.30 3.76,6.3 7.013,6.3 7.938,5.375 17.342,5.375 20.013,8.045 20.013,13.271 U1.29
PD5: J5.29 U1.30 | length 21.9
  Top Layer w0.16: J5.29 11.685,5.04 11.7,5.055 17.475,5.055 20.578,8.158 20.578,12.706 U1.30
PD6: J5.32 U1.31 | length 25.4
  Top Layer w0.16: J5.32 3.82,3.82 10.917,3.82 11.832,4.735 17.607,4.735 21.144,8.272 21.144,12.14 U1.31
PD7: J5.31 U1.32 | length 22.8
  Top Layer w0.16: J5.31 6.04,3.5 11.05,3.5 11.965,4.415 17.74,4.415 21.523,8.198 21.523,11.282 22.083,11.842 U1.32
PE0: J1.1 J5.1 U1.2 U2.12 | length 51.3
  Top Layer w0.16: J5.1 6.112,41.672 20.107,41.672 20.427,41.352 21.1,40.679 J1.1 20.65,39.475 20.65,31.554 U1.2 24.94,27.264 24.94,21.447 v1(24.944,21.443)
  Bottom Layer w0.16: v1(24.944,21.443) 29.783,16.604 29.783,12.273 28.725,11.215 U2.12
PE1: J1.2 J5.4 U1.3 U2.11 | length 54
  Top Layer w0.16: J5.4 3.74,39.3 5.75,39.3 6.872,38.178 16.511,38.178 17.584,39.251 17.978,39.251 18.6,39.872 18.6,32.473 21.325,29.747 21.882,29.747 24.4,27.229 v1(24.4,22.6)
  Bottom Layer w0.16: v1(24.4,22.6) 24.909,22.091 25.059,22.091 30.195,16.955 30.195,11.415 28.725,9.945 U2.11
PE2: J5.3 U1.4 | length 18.9
  Top Layer w0.16: J5.3 5.242,37.858 12.084,37.858 U1.4
PE3: J5.6 U1.5 | length 21.1
  Top Layer w0.16: J5.6 3.755,36.775 12.035,36.775 U1.5
PE4: J5.5 U1.6 | length 17.2
  Top Layer w0.16: J5.5 12.158,35.52 U1.6
PE5: J5.8 U1.7 | length 19.4
  Top Layer w0.16: J5.8 3.77,34.25 12.297,34.25 U1.7
PE6: J5.7 U1.8 | length 15.4
  Top Layer w0.16: J5.7 12.436,32.98 U1.8
PE7: J5.10 U1.9 | length 17.6
  Top Layer w0.16: J5.10 3.735,31.675 12.609,31.675 U1.9
PEN: J5.2 U1.1 | length 25.9
  Top Layer w0.16: v1(13.875,37.25) 14.825,36.3 v1(17.5,36.3) ; v1(21.45,36.025) 21.45,35.906 21.659,35.697 21.659,31.676 U1.1
  Bottom Layer w0.16: J5.2 3.565,39.535 6.34,39.535 8.625,37.25 v1(13.875,37.25) ; v1(17.5,36.3) 21.056,36.3 21.331,36.025 v1(21.45,36.025)
PF0: J6.3 U1.61 | length 20.6
  Top Layer w0.16: U1.61 26.114,29.566 33.322,36.775 41.855,36.775 J6.3
PF1: J6.6 U1.60 | length 17.2
  Top Layer w0.16: U1.60 29.998,32.308 29.998,32.998 32.765,35.765 40.355,35.765 J6.6
PF2: J6.5 U1.59 | length 18.8
  Top Layer w0.16: U1.59 32.607,33.785 39.553,33.785 40.043,34.275 41.895,34.275 J6.5
PF3: J6.8 U1.58 | length 14.9
  Top Layer w0.16: U1.58 32.933,32.98 J6.8
PF4: J6.7 U1.57 | length 17.7
  Top Layer w0.16: U1.57@27.952,26.868 U1.57 32.784,31.7 40.826,31.7 42.075,32.949 43.109,32.949 J6.7
PF5: J6.10 U1.56 | length 13.2
  Top Layer w0.16: U1.56 32.656,30.44 J6.10
PF6: J6.9 U1.55 | length 15.4
  Top Layer w0.16: U1.55 32.497,29.15 41.85,29.15 J6.9
PF7: J6.12 U1.54 | length 11.5
  Top Layer w0.16: U1.54 32.378,27.9 J6.12
PG0: J6.31 U1.33 | length 25.4
  Top Layer w0.16: U1.33 29.435,6.93 36.445,6.93 38.817,4.558 38.817,1.583 39.15,1.25 41.89,1.25 J6.31
PG1: J6.32 U1.34 | length 20.2
  Top Layer w0.16: U1.34 30.246,7.25 36.578,7.25 39.137,4.691 39.137,3.911 40.547,2.5 J6.32
PG2: J6.21 U1.43 | length 15.1
  Top Layer w0.16: U1.43 33.753,13.925 41.865,13.925 J6.21
PG3: J5.17 U1.18 | length 9.6
  Top Layer w0.16: J5.17 5.424,20.28 6.21,19.494 13.79,19.494 U1.18
PG4: J5.20 U1.19 | length 12.9
  Top Layer w0.16: J5.20 3.688,18.928 14.356,18.928 U1.19
RESET: C10.1 J1.4 J5.19 R3.1 SW1.1 SW1.3 U1.20 | length 76.7
  Top Layer w0.16: J5.19 5.1,17.8 14.359,17.8 U1.20@14.834,18.275 ; v1(15.225,37.475) 17.531,37.475 17.781,37.725 v1(17.9,37.725) ; U1.20 15.669,19.11 15.669,19.659 v1(22.935,26.925) ; v1(23.2,38.1) 23.2,40.575 v1(24.725,42.1)
  Bottom Layer w0.16: J1.4 13.6,39.135 15.225,37.51 v1(15.225,37.475) ; v1(17.9,37.725) 17.975,37.65 22.75,37.65 v1(23.2,38.1) ; v1(22.935,26.925) 29.825,26.925 37.519,34.619 37.675,34.619 37.675,37.513 C10.1 37.725,37.575 36.2,39.1 R3.1 36.188,39.788 SW1.1 35.534,41.275 34.544,42.265 25.009,42.265 24.844,42.1 v1(24.725,42.1)
"UART0 RX": J4.2 U2.13 | length 11.7
  Bottom Layer w0.16: J4.2 22.35,7.11 27.725,12.485 U2.13
"UART0 TX": J4.3 U2.14 | length 14
  Bottom Layer w0.16: J4.3 19.85,5.88 27.725,13.755 U2.14
"UART1 RX": J3.2 U2.8 | length 4.7
  Bottom Layer w0.16: J3.2 32.7,6.73 33.375,7.405 U2.8
"UART1 TX": J3.3 U2.7 | length 7
  Bottom Layer w0.16: J3.3 30.2,5.5 33.375,8.675 U2.7
XTAL1: C3.2 J5.23 U1.24 Y1.2 | length 18
  Top Layer w0.16: v1(11.978,9.247) 12.196,9.247 Y1.2 14.499,13.415 U1.24
  Bottom Layer w0.16: J5.23 8.453,9.247 v1(11.978,9.247)
XTAL2: C4.2 U1.23 Y1.1 | length 10.2
  Top Layer w0.16: C4.2 8.761,12.71 Y1.1 14.952,14.999 U1.23
pads on no net: J5.22 J5.24 J6.14

## Polygon pours and split planes (outlines as drawn)
GND on Top Layer "GND_L01_P000" (solid, remove dead copper, pour order 0): 0,0 45.6,0 45.6,43.2 0,43.2
GND on Bottom Layer "GND_L02_P001" (solid, remove dead copper, pour order 1): 0,0 45.6,0 45.6,43.2 0,43.2

## Keep-outs
Keep-Out Layer:
  the board outline again, w0.5